# Altium PCB 遥控按键.PCBDOC
Units mm, origin at the board's own origin, x right, y up, seen from the top; angles counter-clockwise.
Board outline 70.36 x 87.5 mm, 2 copper layers (Top Layer, Bottom Layer); 26 components, 33 nets, 105 pads, 48 vias.
Unrouted connection lines stored in the file: 4.
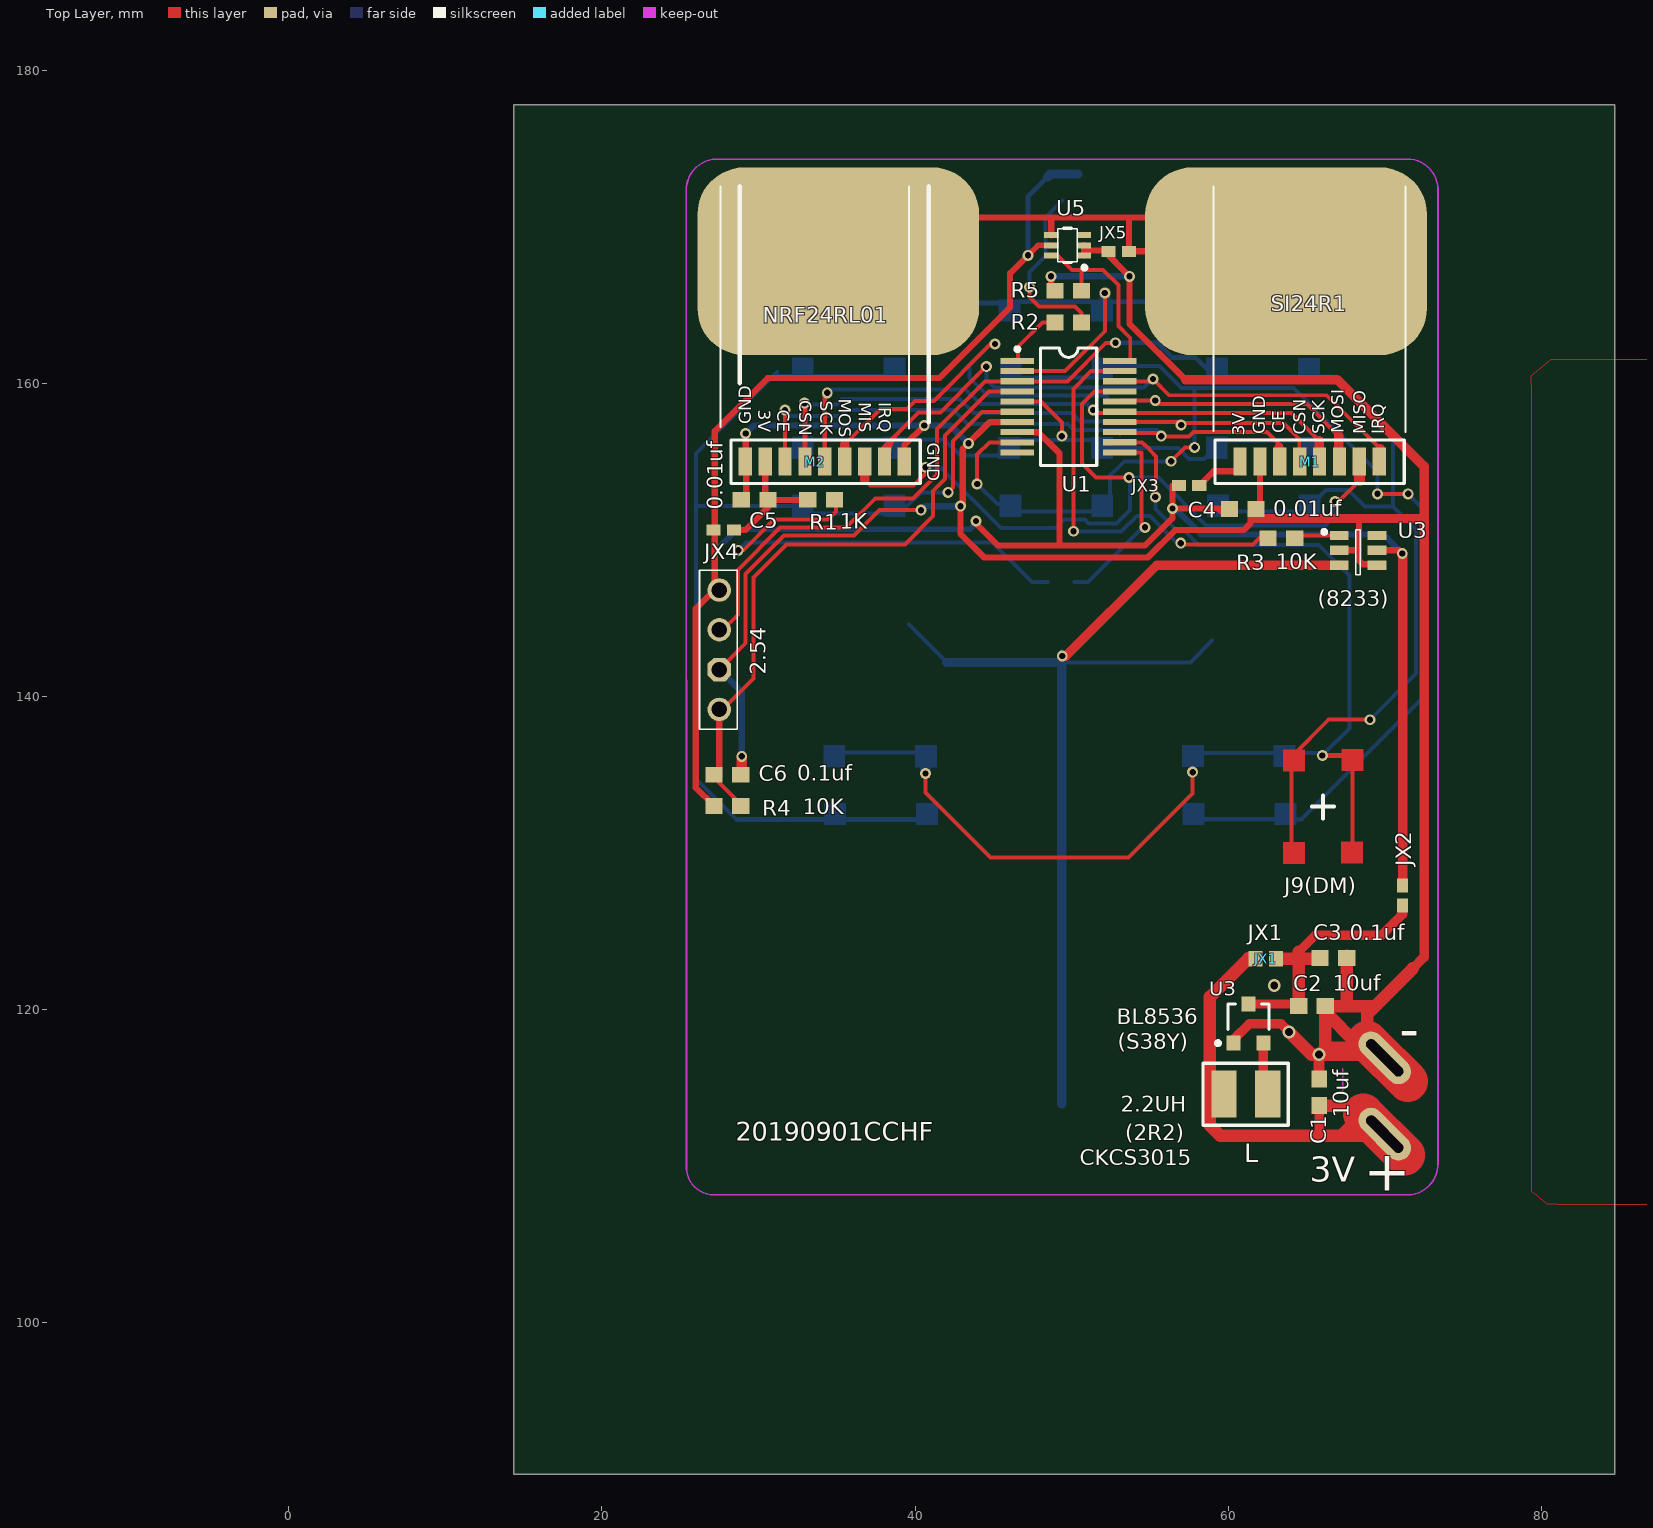
[diagram p0: Top Layer view]
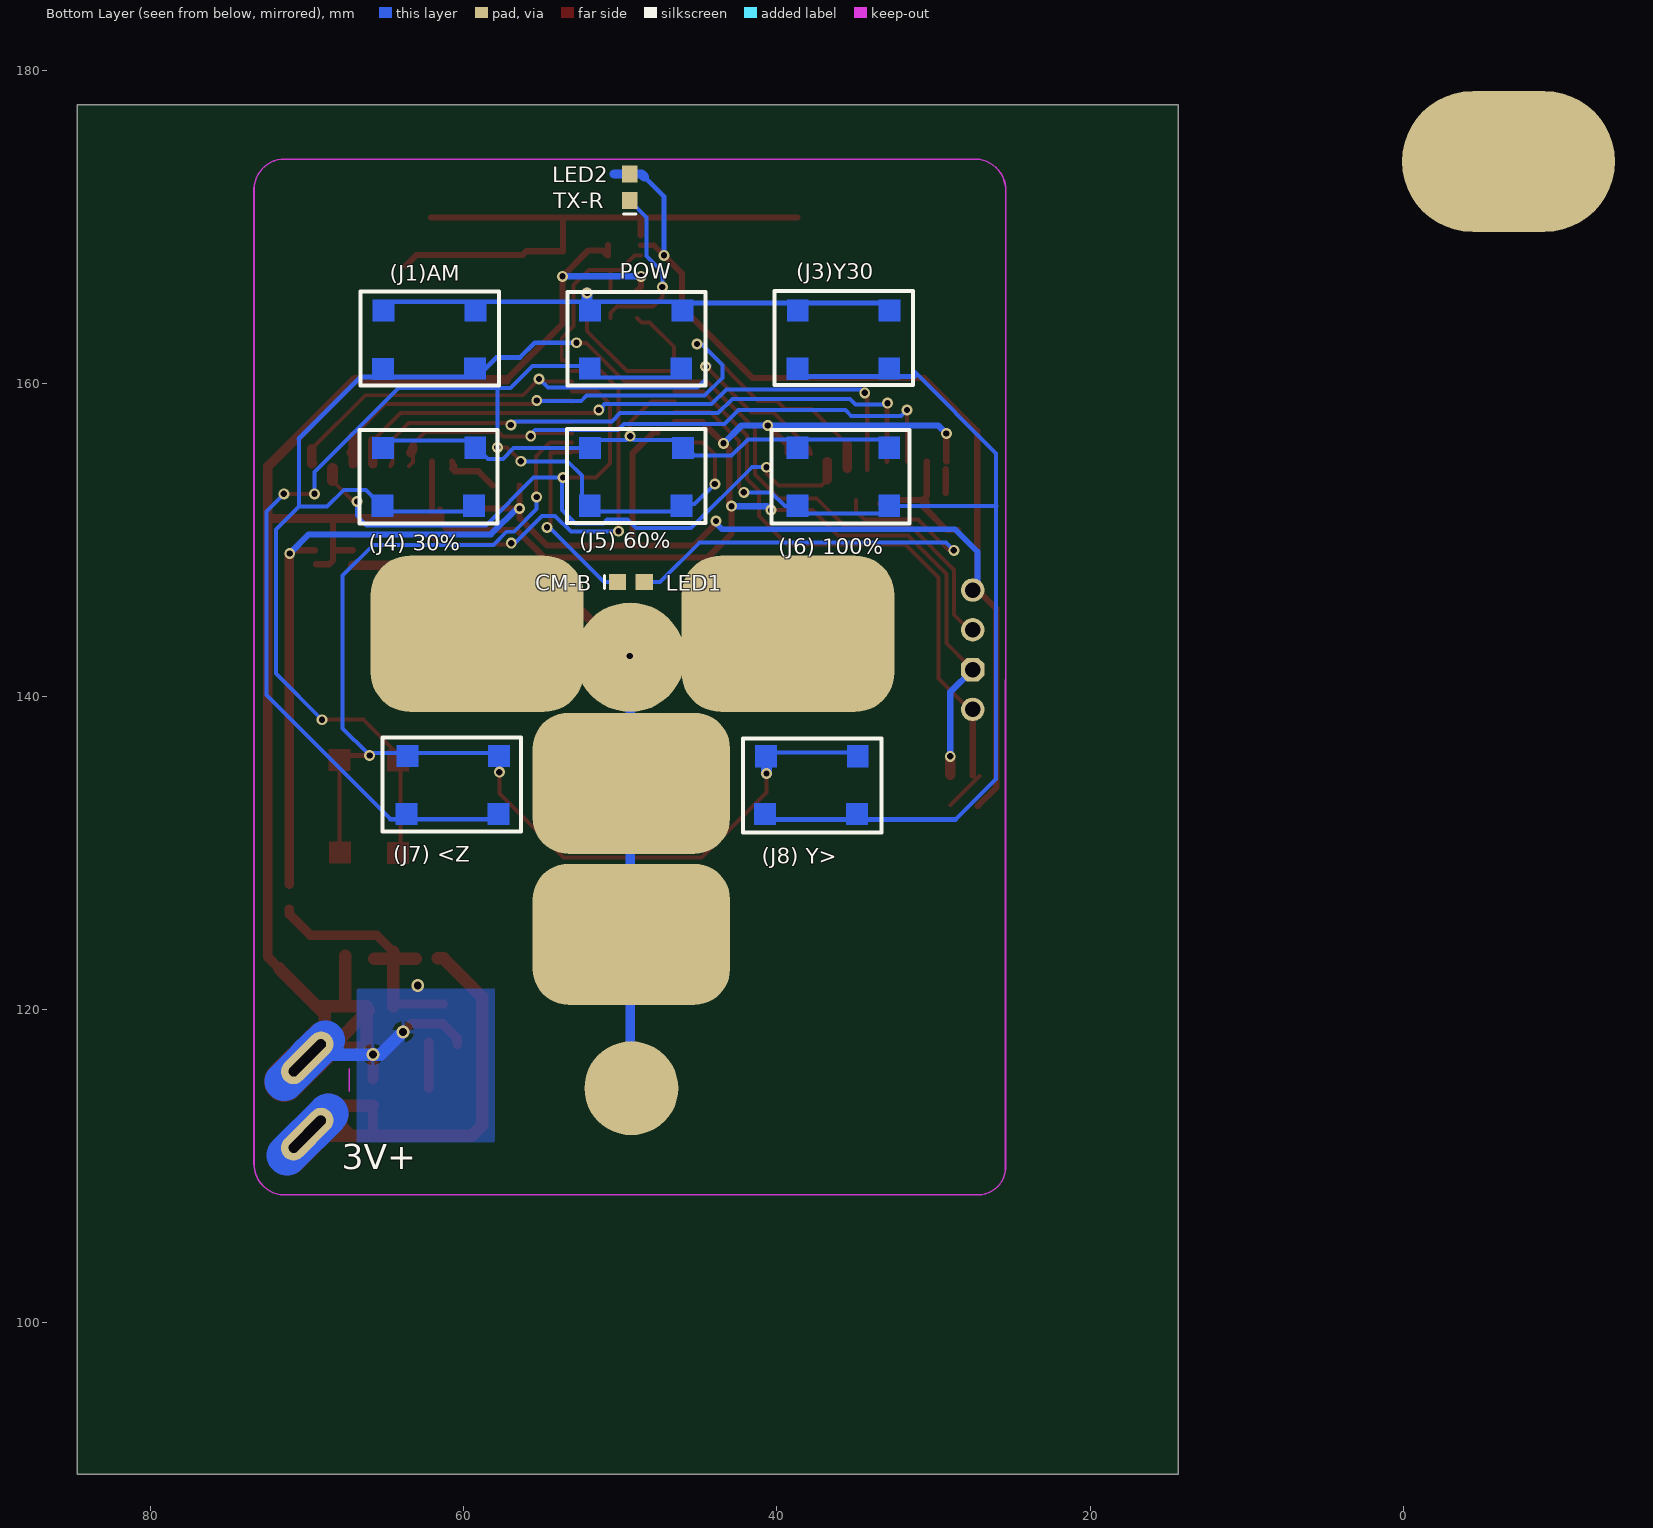
[diagram p1: Bottom Layer view, seen from below]

## Layer stack, top to bottom
Top Layer: signal copper 0.0356
Dielectric: dielectric 0.32, FR-4, Dk 4.8
Bottom Layer: signal copper 0.0356

## Board outline
19.304,90.297 84.709,90.297 84.709,177.8 14.351,177.8 14.351,90.297

## Design rules (kind name [scope] priority, off if disabled: settings)
Clearance [All] p1: gap=0.254
FabricationTestPointUsage TestPointUsage [All] p1: valid=0 allowmultiple=FALSE
FabricationTestpoint Testpoint [All] p1: side=3 testpointundercomponent=TRUE minsize=1.016 maxsize=2.54 preferedsize=1.524 minholesize=0 maxholesize=1.016 preferedholesize=0.813 testpointgrid=0.025 allowsidetop=TRUE allowsidebottom=TRUE usegrid=TRUE gridtolerance=0
PolygonConnect [All] p1: connectstyle=Relief reliefconductorwidth=0.254 reliefentries=4 polygonreliefangle="90 Angle"
RoutingVias [All] p1: holewidth=0.4 width=0.8 viastyle="Through Hole" minholewidth=0.4 minwidth=0.6 maxholewidth=1 maxwidth=1.5
SilkscreenOverComponentPads [All] p1: minsilkscreentomaskgap=0.254
SolderMaskExpansion [All] p1: expansion=0.102
Width Width_9 [InNet('3V3')] p1: maxlimit=1 minlimit=0.254 preferedwidth=0.6 toplayer_prefwidth=0.55 minimp=50.000000 maximp=50.000000 favimp=50.000000
Width Width_8 [InNet('3V+')] p2: maxlimit=3 minlimit=0.254 preferedwidth=0.8 toplayer_prefwidth=0.55 minimp=50.000000 maximp=50.000000 favimp=50.000000
Width Width_7 [InNet('L-3V')] p3: maxlimit=1 minlimit=0.254 preferedwidth=0.6 toplayer_prefwidth=0.55 minimp=50.000000 maximp=50.000000 favimp=50.000000
Width Width_6 [InNet('T-3V')] p4: maxlimit=1 minlimit=0.254 preferedwidth=0.6 toplayer_prefwidth=0.55 minimp=50.000000 maximp=50.000000 favimp=50.000000
Width Width_5 [InNet('3V')] p5: maxlimit=1 minlimit=0.254 preferedwidth=0.6 toplayer_prefwidth=0.39 minimp=50.000000 maximp=50.000000 favimp=50.000000
Width Width_4 [InNet('T-3V')] p6: maxlimit=1 minlimit=0.254 preferedwidth=0.6 toplayer_prefwidth=0.55 minimp=50.000000 maximp=50.000000 favimp=50.000000
Width Width_3 [InNet('D1-')] p7: maxlimit=1 minlimit=0.3 preferedwidth=0.8 toplayer_prefwidth=0.6 minimp=50.000000 maximp=50.000000 favimp=50.000000
Width Width_2 [InNet('GND')] p8: maxlimit=3 minlimit=0.254 preferedwidth=0.8 toplayer_prefwidth=0.39 minimp=50.000000 maximp=50.000000 favimp=50.000000
Width Width_1 [InNet('3V')] p9: maxlimit=1 minlimit=0.254 preferedwidth=0.6 toplayer_prefwidth=0.55 minimp=50.000000 maximp=50.000000 favimp=50.000000
Width [All] p10: maxlimit=2 minlimit=0.254 preferedwidth=2 bottomlayer_prefwidth=0.8 minimp=50.000000 maximp=50.000000 favimp=50.000000
25 further rules are at their usual default settings.

## Components (designator, comment, footprint, x,y, rotation, side; value= is the part's Value field where it differs from the comment)
2.54 "2.54HP" HDR1X4 27.5,139.167 r90 top (schematic designator SX)
(8233) "U3" SOT23-6_M 68.301,149.327 r0 top
C1 "10uf" CR1608-0603 65.811,114.706 r90 top
C2 "10uf" CR1608-0603 65.354,120.218 r180 top
C3 "0.1uf" CR1608-0603 66.726,123.292 r0 top
C4 "0.01uf" CR1608-0603 60.935,151.968 r180 top
C5 "0.01uf" CR1608-0603 29.75,152.552 r0 top
C6 "0.1uf" CR1608-0603 28.016,135 r0 top
JX1 "JX1" CR1005-0402#1 62.408,123.241 r0 top
JX2 "JX3" CR1005-0402#2 71.145,127.279 r270 top
JX3 "JX2" CR1005-0402#2 57.506,153.467 r0 top
JX4 "JX2" CR1005-0402#2 27.788,150.622 r0 top
JX5 "JX2" CR1005-0402#2 53.01,168.427 r180 top
L "2.2UH" L7 61.519,115.57 r180 top locked
LED1 "CM-B" CC1608-0603 49.327,147.3 r180 bottom
LED2 "TX-R" CC1608-0603 49.403,172.517 r90 bottom
M1 "SI24R1" MHDR1X8 69.65,155 r180 top locked
M2 "NRF24L01" MHDR1X8 38.049,155 r180 top locked
R1 "1K" CR1608-0603 34,152.552 r180 top
R2 "1K" CR1608-0603 49.784,163.881 r180 top
R3 "10K" CR1608-0603 63.398,150.089 r180 top
R4 "10K" CR1608-0603 28.016,133 r0 top
R5 "10K" CR1608-0603 49.784,165.913 r180 top
U1 "STM8L051F3P6" SSOP20 49.809,158.501 r270 top locked
U3 "BL8536" SO-G3/C2.5 61.3,119.1 r0 top
U5 "BL1551-A810" SOT23-6_N 49.75,168.808 r180 top

## Footprints (in the part's own frame and the unit in brackets; to place one, negate y for a bottom-side part, rotate by r counter-clockwise, add the part's x,y. Pads: shape width x height; smd on the part's side, far side on the other; paste and mask are expansions set on the pad)
CC1608-0603 [mm] "Chip Capacitor; Body 1.6 x 0.8 mm (LxW typ)"
  rect 1.1x1 smd: 1(-0.85,0) 2(0.85,0)
  silkscreen extent -1.7,-0.4 -1.7,0.4
CR1005-0402#1 [mm] "Chip Resistor; Body 1.1 x 0.5 mm (LxW typ)"
  rect 0.9x1 smd: 1(-0.65,0) 2(0.65,0)
CR1005-0402#2 [mm] "Chip Resistor; Body 1.1 x 0.5 mm (LxW typ)"
  rect 0.9x0.7 smd: 1(-0.65,0) 2(0.65,0)
CR1608-0603 [mm] "Chip Resistor; Body 1.6 x 0.8 mm (LxW typ)"
  rect 1.1x1 smd: 1(-0.85,0) 2(0.85,0)
HDR1X4 [mm]
  round 1.5 hole 1: 1(0,0) 3(5.08,0) 4(7.62,0)
  oct 1.5x1.5 hole 1: 2(2.54,0)
  silkscreen extent -1.27,-1.14 8.89,1.27
L7 [mm]
  rect 1.6x3 smd: 1(1.791,0.964) 2(-1.009,0.964)
  silkscreen extent -2.31,-1.01 3.12,2.96
MHDR1X8 [mm] "Connector; Header; 8 Position"
  rect 0.85x1.8 smd: 1(0,0) 2(1.27,0) 3(2.54,0) 4(3.81,0) 5(5.08,0) 6(6.35,0) 7(7.62,0) 8(8.89,0)
  silkscreen extent -1.6,-1.36 10.49,1.4
SO-G3/C2.5 [mm]
  rect 0.9x0.95 smd: 1(-0.95,-1.25) 2(0.95,-1.25) 3(0,1.25)
  silkscreen extent -2.07,-1.37 1.3,1.25
SOT23-6_M [mm]
  rect 1.2x0.59 smd: 1(-1.2,0.95) 2(-1.2,0) 3(-1.2,-0.95) 4(1.2,-0.95) 5(1.2,0) 6(1.2,0.95)
  silkscreen extent -2.29,-1.55 0.15,1.31
SOT23-6_N [mm] "SOT23, 6-Leads, Body 2.9x1.6mm, Pitch 0.95mm, Lead Span 2.7mm, IPC Medium Density"
  rect 0.9x0.39 smd: 1(-1.05,0.65) 2(-1.05,0) 3(-1.05,-0.65) 4(1.05,-0.65) 5(1.05,0) 6(1.05,0.65)
  silkscreen extent -1.19,-1.09 0.63,1.55
SSOP20 [mm] "SSOP, Plastic; 20 Leads; Body Width 5.3 mm; Pitch 0.65 mm"
  rect 0.39x2.15 smd: 1(-2.925,-3.275) 2(-2.275,-3.275) 3(-1.625,-3.275) 4(-0.975,-3.275) 5(-0.325,-3.275) 6(0.325,-3.275) 7(0.975,-3.275) 8(1.625,-3.275) 9(2.276,-3.275) 11(2.925,3.275) 13(1.625,3.275) 15(0.325,3.275) 16(-0.325,3.275) 17(-0.975,3.275) 18(-1.625,3.275) 19(-2.275,3.275) 20(-2.925,3.275)
  rect 0.395x2.15 smd: 10(2.925,-3.275) 12(2.276,3.275) 14(0.975,3.275)
  silkscreen extent -3.8,-3.4 3.75,1.8

## Part data
U1: library part ST6208CN6, "8-Bit ROM MCU with A/D Converter, Two Timers, Oscillator Safeguard and Safe Reset, 20-Pin SSOP, Industrial"
U3: library part QNPN, "N"

## Free pads (board coordinates)
  oval 13.6x9 smd far side: 0(-6.73,174.166)
  rrect50% 18x12 smd: 0(35.1,167.792) 0(63.703,167.792)
  rrect50% 13.6x10 smd far side: 0(39.3,144) 0(59.15,144)
  rect 0.85x1.8 smd: 0(39.319,155)
  round 6 smd far side: 0(49.3,114.97)
  rrect50% 12.6x9 smd far side: 0(49.3,124.8) 0(49.3,134.442)
  round 7 smd far side: 0(49.378,142.5)
  oval 4.1x1.6 hole 0.65 slot 3.1 at 135 deg rot 135: 1(70,112.038) 1(70,116.91)

## Via types
v1: diameter 0.7, hole 0.4, Top Layer to Bottom Layer, 45 vias
v2: diameter 0.82, hole 0.5, Top Layer to Bottom Layer, 3 vias

## Nets (pads, with @x,y where several pads share a name; then routed paths per layer and width w, separated by ;. In a path a pad name is that pad's centre, name@x,y a point inside that pad or via, vN(x,y) a via of type N, cw(c..) or ccw(c..) an arc to the next point about the centre after c; other vN are vias at no path point)
3.3V: 
3V: 2.54.4 (8233).5 C2.2 C3.1 C4.2 C5.2 JX1.2 JX2.1 JX2.2 JX3.1 JX3.2 JX4.1 JX4.2 LED2.2 M1.8 M2.7 R1.2 R4.1 U1.8 U3.3 U5.5 | length 178.2
  Top Layer w0.36: v1(47.219,168.173) 47.854,168.808 U5.5
  Top Layer w0.39: 2.54.4@27.203,147.269 27.203,156.947 30.582,160.325 41.554,160.325 46.076,164.846 46.076,167.03 v1(47.219,168.173) ; 2.54.4@27.229,147.058 2.54.4 ; C5.2@30.414,152.39 30.577,152.552 30.67,152.552 33.172,152.552 R1.2@33.426,152.298 ; JX3.1@56.439,153.467 v1(56.439,151.994) 59.399,151.994 C4.2@59.729,151.663 ; JX3.2 59.07,154.381 60.58,154.381 60.604,154.406 M1.8@60.658,154.822 ; M1.8@60.605,154.407 M1.8@60.61,154.411 ; M1.8@60.76,154.561 60.658,154.46 M1.8@60.61,154.411 ; M1.8 60.61,154.711 M1.8@60.61,154.411
  Top Layer w0.4: R4.1 25.997,134.169 25.997,145.606 27.178,146.787 2.54.4 ; JX4.2 29.159,150.622 30.67,152.132 30.67,152.552 30.429,152.793 M2.7 ; v1(43.891,151.206) 43.891,151.054 45.314,149.631 54.686,149.631 56.439,151.384 v1(56.439,151.994) ; 47.638,156.874 47.875,156.874 49.225,155.524 49.225,149.682 ; M1.8@60.605,154.407 M1.8 ; M1.8@60.658,154.46 M1.8@60.658,154.822 ; 69.501,149.327 70.917,149.327 v1@71.145,149.098
  Top Layer w0.6: U3.3 C2.2@64.469,120.35 ; 64.504,123.686 65.557,124.739 69.799,124.739 71.145,126.086 JX2.2@71.145,126.416 ; JX2.1@71.145,127.991 v1@71.145,149.098
  Top Layer w0.8: JX1.2 C3.1@65.723,123.241 ; C2.2 64.504,123.686
  Bottom Layer w0.3: v1@47.219,168.097 47.219,171.933 48.463,173.177
  Bottom Layer w0.38: 2.54.4@27.711,146.787 27.203,147.295 27.203,149.25 28.626,150.673 43.51,150.673 43.891,151.054 v1(43.891,151.206)
  Bottom Layer w0.4: v1@56.528,152.083 58.269,150.343 69.901,150.343 v1(71.12,149.123)
  Bottom Layer w0.6: 48.463,173.177 48.653,173.367 50.394,173.367
3V+: C1.1 JX1.1 L.1 pad.1@70,112.038 | length 43.4
  Top Layer w0.254: 66.624,111.941 66.65,111.967
  Top Layer w0.6: 65.811,112.017 C1.1 ; pad.1@68.631,113.335 pad.1@69.571,112.395
  Top Layer w0.8: JX1.1@61.671,123.266 61.29,123.266 58.826,120.802 58.826,112.598 59.483,111.941 66.624,111.941 67.237,111.941 ; C1.1 68.109,113.856 68.378,113.587 pad.1@68.378,113.082 ; pad.1@68.631,113.335 pad.1@68.378,113.082 ; pad.1@69.571,112.395 pad.1@69.213,112.038 ; 67.237,111.941 69.903,111.941 pad.1@70,112.038 ; 67.237,111.941 pad.1@68.378,113.082 ; pad.1@68.378,113.082 68.378,112.038 pad.1@69.213,112.038 ; pad.1@69.213,112.038 69.178,112.002 pad.1@70,112.038 ; pad.1@69.213,112.038 69.928,112.038 pad.1@70,112.038
  Top Layer w2.6: pad.1@68.631,113.335 pad.1@71.26,110.706
  Bottom Layer w2.6: pad.1@68.658,113.333 pad.1@71.298,110.693
AHLB: 
BAT_ADC: U1.10
CE: M1.6 M2.6 U1.13 | length 41.2
  Top Layer w0.254: M2.6 v1(31.699,158.293) ; U1.13@53.081,156.804 53.096,156.82 55.524,156.82 55.753,156.591 57.513,156.591 57.798,156.876 62.478,156.876 63.246,156.108 63.246,154.965 M1.6@63.5,154.711
  Top Layer w0.6: 63.246,155.907 ccw(c63.732,155.907) 63.388,155.563 cw(c63.732,155.907) 63.246,155.907
  Bottom Layer w0.254: v1(31.699,158.293) 32.08,157.912 35.255,157.912 35.636,158.293 42.469,158.293 43.358,157.404 49.784,157.404 50.165,157.023 55.448,157.023 v1@55.728,156.743
  other v1: 55.728,156.616
CMOUT: (8233).1 R3.1 R3.2 U1.19 | length 29.7
  Top Layer w0.254: v1(50.114,150.546) 50.114,159.639 51.251,160.776 U1.19 ; v1@56.972,149.911 57.175,149.708 61.595,149.708 62.164,150.277 R3.2@62.687,150.277 ; R3.1@64.248,150.277 67.101,150.277
  Bottom Layer w0.254: v1(50.114,150.546) 50.114,150.724 50.317,150.52 53.162,150.52 54.173,151.531 54.997,151.531 56.753,149.774 v1@56.963,149.774
  other v1: 56.972,149.784
CSN: M1.5 M2.5 U1.14 | length 42.9
  Top Layer w0.254: U1.14 56.799,157.526 v1(56.998,157.328) ; v1@56.998,157.452 63.528,157.452 64.541,156.439 64.541,154.864 64.694,154.711 M1.5
  Top Layer w0.3: v1(32.944,158.725) 32.969,158.699 M2.5
  Bottom Layer w0.254: v1(32.944,158.725) 32.868,158.648 34.976,158.648 35.331,159.004 42.85,159.004 43.764,158.09 50.013,158.09 50.546,157.556 56.769,157.556 v1(56.998,157.328)
GND: 2.54.2 (8233).2 (8233).4 C1.2 C2.1 C3.2 C4.1 C5.1 C6.2 JX5.2 M1.7 M2.8 pad.0@39.319,155 pad.1@70,116.91 R5.2 U1.7 U3.1 U5.1 U5.2 | length 222.8
  Top Layer w0.254: 2.54.2@27.711,141.918 29.185,143.391 29.185,147.828 31.623,150.266 36.093,150.266 37.719,151.892 40.183,151.892 v1@40.386,151.689
  Top Layer w0.4: 2.54.2@27.711,141.707 2.54.2@27.711,141.918 ; M2.8 29.185,155.025 v1(29.185,156.794) ; C5.1@29.21,152.994 M2.8@29.21,154.508 ; pad.0@39.319,155.549 39.319,156.032 v1@40.615,157.328 ; U1.7 44.775,157.526 43.053,155.804 43.053,152.298 v1(42.901,152.146) 42.901,150.393 44.425,148.869 54.864,148.869 56.617,150.622 60.985,150.622 61.429,151.066 C4.1@61.429,151.663 ; v1(48.692,166.827) 48.692,166.155 R5.2 ; U5.2 U5.1 51.119,168.478 52.045,168.478 v1(53.696,166.827) 53.696,163.805 57.277,160.223 ; C4.1@61.519,151.917 C4.1@61.849,151.587 ; 61.62,151.359 62.03,151.768 M1.7 ; 67.101,149.327 68.263,149.327 ; 68.351,151.409 68.351,148.692 68.605,148.438 69.437,148.438 ; pad.1@69.127,117.766 69.545,117.348 pad.1@70,116.91
  Top Layer w0.6: 57.277,160.223 66.98,160.223 72.517,154.686 72.517,123.342 71.806,122.631 ; U3.1@60.411,117.789 60.411,118.145 61.341,119.075 63.398,119.075 v2@63.856,118.618 ; 61.62,151.359 72.517,151.359
  Top Layer w0.7: C6.2@28.931,135 v1(28.931,136.169) ; C1.2 v2(65.811,117.119)
  Top Layer w0.8: v2(63.881,118.567) 65.329,117.119 v2(65.811,117.119) ; C2.1@66.091,119.939 C2.1@66.204,119.825 ; 66.524,117.562 68.897,117.562 68.455,117.119 v2(65.811,117.119) ; 67.576,120.269 C3.2@67.576,123.444 ; pad.1@68.897,117.97 68.897,119.723 71.806,122.631 ; pad.1@69.127,117.766 69.102,117.766 68.263,117.766 C2.1@66.204,119.825 ; 69.336,120.218 C2.1 C2.1@66.204,119.825 ; v2(65.811,117.119) 66.204,117.512 C2.1@66.204,119.825
  Top Layer w2.6: pad.1@68.897,117.97 69.102,117.766 71.476,115.392
  Bottom Layer w0.4: 2.54.2 28.931,140.276 v1(28.931,136.169) ; v1(29.185,156.794) 29.693,157.302 v1(40.589,157.302) 42.266,157.302 v1(43.409,156.159) ; v1(40.386,151.892) 40.64,152.146 v1(42.901,152.146) v1@42.901,152.095 ; v1(48.692,166.827) 53.721,166.827 v1@53.708,166.84 ; 68.683,116.994 68.683,117.119 68.683,118.21 pad.1@70,116.91
  Bottom Layer w0.8: v2(63.881,118.567) 65.329,117.119 v2(65.811,117.119) 68.683,117.119 69.748,117.119 69.791,117.119 pad.1@70,116.91
  Bottom Layer w2.5: pad.1@70,116.91 68.836,118.032 69.748,117.119 71.476,115.392
  other v2: 62.941,121.539
GND2: JX5.1 pad.0@35.1,167.792 pad.0@63.703,167.792 U5.4 | length 37.1
  Top Layer w0.4: pad.0@38.684,170.586 53.619,170.586 ; U5.4 48.699,170.552 ; pad.0@62.078,170.586 53.619,170.586 ; pad.0@63.703,167.5 63.004,168.199 56.236,168.199 56.007,168.427 JX5.1 53.66,170.546 53.619,170.586
HWKZ: 
HWPOW: 
IRQ: M1.1 M2.1 U1.18 | length 47.4
  Top Layer w0.254: M2.1@37.92,155.744 ccw(c37.627,156.355) 38.282,156.18 ; 38.049,155.956 40.234,158.14 41.631,158.14 44.323,160.833 v1@44.323,161.138 ; 38.25,156.06 ccw(c38.805,155.911) M2.1@38.307,155.624 ; U1.18 55.046,160.126 v1(55.194,160.274) 56.236,159.233 66.294,159.233 M1.1@69.723,155.804 ; M1.1@69.469,154.864 M1.1@69.621,154.711 ; M2.1@37.839,155.475 cw(c38.493,155.475) 38.031,155.938 ccw(c38.493,155.475) M2.1@37.839,155.475 ; M2.1@38.093,155.475 cw(c39.361,155.475) 38.464,156.371 ccw(c39.361,155.475) M2.1@38.093,155.475 ; M2.1@38.347,155.475 cw(c40.228,155.475) 38.898,156.805 ccw(c40.228,155.475) M2.1@38.347,155.475
  Top Layer w0.6: M1.1@69.723,154.838 M1.1@69.723,155.804
  Bottom Layer w0.254: v1@44.323,161.138 44.552,160.909 44.552,160.249 45.085,159.715 54.635,159.715 v1(55.194,160.274)
  other v1: 44.552,161.061
JA: U1.2 | length 45.8
  Top Layer w0.254: U1.2 49.575,160.776 52.121,163.322 v1(52.121,165.76)
  Bottom Layer w0.254: 51.892,165.202 51.892,164.567 ; 51.968,165.202 51.968,164.516 51.918,164.567 51.892,164.567 ; 51.892,164.567 51.816,164.49 51.74,164.567 51.892,164.567
  Bottom Layer w0.3: 33.146,165.125 45.466,165.125 45.999,164.592 ; 45.955,164.871 46.285,165.202 51.892,165.202 51.968,165.202 64.541,165.202 65.202,164.541
  Bottom Layer w0.4: 32.536,164.516 33.146,165.125
  Bottom Layer w0.7: 52.121,164.389 v1(52.121,165.76)
JB: U1.5 | length 38.7
  Top Layer w0.254: U1.5 48.057,158.826 49.378,157.505 v1(49.378,156.616)
  Bottom Layer w0.254: 32.588,156.261 32.741,156.413 41.859,156.413 42.901,155.372 45.263,155.372 46.279,156.388 49.149,156.388 v1(49.378,156.616) 49.606,156.388 51.74,156.388 52.273,155.854 56.82,155.854 57.5,155.174 58.451,155.174 59.614,156.337 64.795,156.337 ; 58.673,155.296 58.723,155.346 ; 65.405,155.956 65.43,155.931
JC: U1.12 | length 80.3
  Top Layer w0.254: v1(40.665,135.077) 40.665,133.858 44.831,129.692 53.645,129.692 57.734,133.782 v1(57.734,135.153) ; U1.12 54.493,156.225 54.635,156.083 54.668,156.083 54.966,155.785 54.966,155.753 55.397,155.321 v1@55.397,152.654 ; 67.945,130.302 67.945,136.144
  Top Layer w0.3: v1(66.015,136.22) 67.462,136.22
  Bottom Layer w0.254: 34.519,136.195 34.747,136.423 40.665,136.423 40.894,136.195 40.894,135.89 40.716,136.068 ; 40.589,136.169 40.665,136.093 ; v1(55.347,152.73) 55.347,151.968 56.8,150.515 57.275,150.515 58.108,149.682 65.786,149.682 67.742,147.726 67.742,137.947 66.167,136.373 58.09,136.373
  Bottom Layer w0.4: v1(57.734,135.153) 57.734,136.449
  Bottom Layer w0.7: v1(40.665,135.077) 40.665,136.093
JD: U1.6 | length 77.4
  Top Layer w0.254: v1(42.113,153.035) 42.418,153.34 42.418,156.312 44.282,158.176 U1.6
  Bottom Layer w0.254: 25.984,152.146 32.995,152.146 ; 28.6,132.131 25.997,134.734 25.997,155.512 31.191,160.706 ; 32.662,152.273 33.246,151.689 38.71,151.689 39.167,152.146 39.497,152.146 40.386,153.035 v1(42.113,153.035) ; 38.379,160.706 38.659,160.985
  Bottom Layer w0.3: 28.6,132.131 40.538,132.131 40.919,132.512 ; 31.217,160.426 38.405,160.426
JE: U1.9 | length 86.8
  Top Layer w0.254: v1@43.967,153.416 43.967,155.448 44.745,156.225 U1.9 ; v1(56.363,155.016) 57.252,155.905 v1(57.861,155.905) ; v1@69.52,152.933 v1(71.501,152.933)
  Bottom Layer w0.254: v1(43.967,153.568) 45.263,152.273 46.203,152.273 46.66,151.816 51.841,151.816 52.019,151.994 ; 46.05,160.376 51.689,160.376 ; 51.943,160.96 52.095,161.112 55.601,161.112 57.023,159.69 64.186,159.69 69.545,154.33 v1(69.545,152.933) ; 52.273,151.765 52.451,151.943 52.451,154.102 53.365,155.016 v1(56.363,155.016) ; v1(57.861,155.905) 57.861,159.69 ; 64.694,132.156 72.619,140.081 72.619,151.816 v1(71.501,152.933)
  Bottom Layer w0.3: 58.039,132.156 64.694,132.156
JF: 
L1: L.2 U3.2 | length 2.9
  Top Layer w0.6: L.2@62.24,114.971 U3.2@62.24,117.901
LED2: LED2.1 R2.1 | length 11.1
  Top Layer w0.254: v1(47.32,166.141) 47.32,165.506 47.93,164.897 50.216,164.897 50.634,164.479 R2.1@50.634,164.16
  Bottom Layer w0.254: v1(47.32,166.141) 47.32,167.107 48.336,168.123 48.336,170.6 LED2.1
MISO: M1.2 M2.2 U1.17 | length 51.7
  Top Layer w0.254: 36.779,153.848 37.16,153.467 39.903,153.467 40.665,154.229 v1(40.665,154.635) ; U1.17 51.45,159.476 50.653,158.679 50.653,154.884 51.562,153.975 v1@53.391,153.975 ; v1(66.827,152.451) 67.056,152.451 68.377,153.772 ; M1.2@68.38,154.561 M1.2@68.53,154.711
  Top Layer w0.6: 36.779,153.848 M2.2
  Top Layer w0.7: 68.377,153.772 68.38,153.775 M1.2@68.38,154.561
  Bottom Layer w0.254: v1@40.691,154.635 41.605,154.635 45.491,150.749 48.997,150.749 49.53,151.282 50.851,151.282 51.079,151.054 52.857,151.054 53.721,151.917 v1@53.721,153.975 ; v1(53.67,153.975) 55.55,153.975 58.598,150.927 66.218,150.927 66.827,151.536 v1@66.827,152.553
MOSI: M1.3 M2.3 U1.16 | length 47.1
  Top Layer w0.254: 35.509,156.083 37.795,158.369 39.497,158.369 40.005,158.877 41.199,158.877 44.831,162.509 v1(45.11,162.509) ; U1.16 53.158,158.9 v1(55.344,158.9) 55.57,158.674 65.024,158.674 67.056,156.642 ; M1.3@67.056,154.864 M1.3@67.208,154.711
  Top Layer w0.6: M2.3@35.509,154.559 35.509,156.083 ; M1.3@67.056,154.864 67.056,156.642 ; 67.056,155.907 ccw(c67.542,155.907) 67.198,155.563 cw(c67.542,155.907) 67.056,155.907
  Bottom Layer w0.254: v1@45.06,162.458 v1(45.11,162.509) 44.831,162.509 43.485,161.163 43.485,160.35 44.628,159.207 52.172,159.207 52.502,158.877 v1@55.397,158.877
POW+: R5.1 U1.20 U5.6 | length 11.7
  Top Layer w0.254: U5.6 49.088,168.158 50.013,167.234 50.622,167.234 ; R5.1 50.634,167.222 50.622,167.234 ; U1.20@53.543,161.442 53.746,161.442 53.746,162.89 52.984,163.652 52.984,166.268 52.019,167.234 50.622,167.234
R3: 
RST: 2.54.1 C6.1 R4.2 U1.4 | length 40.4
  Top Layer w0.254: C6.1@27.076,134.899 R4.2@28.926,133.049 ; 2.54.1@27.711,139.167 29.693,141.148 29.693,147.599 31.801,149.708 39.345,149.708 41.148,151.511 41.148,153.111 41.91,153.873 41.91,156.667 44.719,159.476 U1.4
  Top Layer w0.4: C6.1@27.5,134.95 2.54.1
SCK: M1.4 M2.4 U1.15 | length 39.6
  Top Layer w0.254: v1(51.384,158.293) 51.573,158.104 54.317,158.104 54.332,158.09 64.059,158.09 65.811,156.337 ; M1.4@65.659,154.711 M1.4@65.811,154.864
  Top Layer w0.3: M2.4@34.239,154.483 34.239,159.233 v1@34.493,159.487
  Top Layer w0.6: M1.4@65.811,154.864 65.811,156.337
  Bottom Layer w0.254: v1(34.392,159.385) 34.62,159.614 43.231,159.614 44.171,158.674 51.003,158.674 51.156,158.521 v1@51.156,158.293
SWIM/JF: 2.54.3 U1.3 | length 99.7
  Top Layer w0.254: 2.54.3@27.711,144.247 28.677,145.212 28.677,148.082 31.369,150.774 35.585,150.774 37.459,152.648 39.872,152.648 41.402,154.178 41.402,157.074 44.454,160.126 U1.3 49.738,160.126 52.197,162.585 v1(52.807,162.585) ; 64.034,131.19 64.034,136.119 66.421,138.506 v1(69.063,138.506) ; 64.059,130.301 64.059,131.166
  Bottom Layer w0.254: 59.436,152.146 59.76,151.822 64.827,151.822 ; 65.507,151.968 65.507,152.425 66.263,153.182 67.671,153.182 68.732,152.121 70.536,152.121 ; v1(69.063,138.506) 72.009,141.453 72.009,150.647 70.536,152.121 ; 70.536,156.464 70.536,152.121
  Bottom Layer w0.3: v1(52.807,162.585) 55.474,162.585 56.413,161.646 57.912,161.646 59.157,160.401 66.599,160.401 70.536,156.464
T-LED: R2.2 U1.1 | length 4
  Top Layer w0.254: U1.1 46.584,161.475 46.584,162.331 48.133,163.881 48.655,163.881 R2.2@48.934,164.16
TCH: (8233).3 pad.0@39.3,144 pad.0@49.3,114.97 pad.0@49.3,124.8 pad.0@49.3,134.442 pad.0@49.378,142.5 pad.0@59.15,144 | length 70
  Top Layer w0.6: v1(49.403,142.57) 49.631,142.57 55.437,148.377 67.101,148.377
  Bottom Layer w0.254: pad.0@39.6,144.6 pad.0@42.036,142.164 ; pad.0@49.371,142.9 49.371,142.164 57.582,142.164 pad.0@58.979,143.561
  Bottom Layer w0.6: pad.0@42.036,142.164 49.371,142.164 pad.0@49.371,113.97
TOG: (8233).6
XY3V: LED1.2 R1.1 | length 29.1
  Top Layer w0.254: v1@28.651,149.352 29.058,149.352 30.988,151.282 34.417,151.282 34.95,151.816 34.937,151.829 R1.1@34.937,152.552
  Bottom Layer w0.254: v1(28.702,149.327) 29.21,149.835 44.933,149.835 47.467,147.3 LED1.2
Z-LED: LED1.1 U1.11 | length 12.4
  Top Layer w0.254: U1.11@52.73,155.626 53.137,155.626 53.188,155.575 54.458,155.575 v1@54.458,150.851
  Bottom Layer w0.254: LED1.1 51.034,147.3 54.534,150.8 v1(54.686,150.8)
pads on no net: U5.3

## Polygon pours and split planes (outlines as drawn)
GND on Top Layer "Top Layer-No Net" (hatched 90Degree grid 1.5 track 0.203, remove dead copper, pour order 5): 79.399,159.86 79.354,159.897 79.354,160.42 79.354,160.482 80.294,161.249 80.624,161.519 81.302,161.519 125.439,161.519 125.49,161.56 126.42,161.56 126.42,161.415 127.233,160.752 127.408,160.609 127.408,159.963 127.408,115.178 127.055,114.89 125.48,113.605 125.48,113.418 121.264,113.418 120.984,113.646 120.248,113.045 120.248,107.51 81.063,107.51 81.013,107.551 80.573,107.551 80.395,107.551 79.735,108.09 79.407,108.357 79.407,108.897 79.407,159.812 79.399,159.819
GND on Bottom Layer "Top Layer-No Net" (solid, remove dead copper, pour order 6): 58.014,111.56 58.04,111.531 66.827,111.531 66.827,121.253 66.801,121.281 66.775,121.31 58.04,121.31

## Keep-outs
Keep-Out Layer:
  lines w0.1: 25.392,172.288 cw(c27.361,172.352) 27.297,174.32 71.435,174.32 cw(c71.435,172.35) 73.403,172.414 73.403,110.084 ; 25.395,172.288 25.403,109.854 ccw(c27.158,109.91) 27.144,108.154 ; 27.058,108.154 71.501,108.154 ; 67.31,114.783 67.311,116.223 ; 71.498,108.154 ccw(c71.435,110.122) 73.403,110.186

## Other copper
Top Layer:
  region net SWIM/JF: 64.921,129.286 64.921,130.683 63.502,130.683 63.502,129.286
  region net JC: 68.627,129.337 68.627,130.734 67.208,130.734 67.208,129.337
  region net JC: 68.653,135.23 68.653,136.627 67.234,136.627 67.234,135.23
  region net SWIM/JF: 64.922,135.204 64.922,136.601 63.503,136.601 63.503,135.204
Bottom Layer:
  rectangle net JB: 32.131,155.17 33.528,156.589
  rectangle net JB: 37.998,155.172 39.395,156.591
  rectangle net JC: 57.048,135.485 58.445,136.904
  rectangle net JC: 62.89,135.485 64.287,136.904
  rectangle net JE: 62.967,131.775 64.364,133.194
  rectangle net JE: 57.099,131.777 58.496,133.196
  rectangle net JC: 34.138,135.462 35.535,136.881
  rectangle net JC: 40.005,135.46 41.402,136.879
  rectangle net JD: 40.056,131.775 41.453,133.194
  rectangle net JD: 34.188,131.777 35.585,133.196
  rectangle net JA: 58.547,163.933 59.944,165.352
  rectangle net JA: 64.44,163.932 65.837,165.351
  rectangle net SWIM/JF: 64.465,160.201 65.862,161.62
  rectangle net SWIM/JF: 58.598,160.227 59.995,161.646
  rectangle net JB: 58.572,155.17 59.969,156.589
  rectangle net JB: 64.465,155.147 65.862,156.566
  rectangle net SWIM/JF: 64.491,151.46 65.888,152.879
  rectangle net SWIM/JF: 58.649,151.46 60.046,152.879
  rectangle net JB: 51.232,155.147 52.629,156.566
  rectangle net JE: 51.257,151.46 52.654,152.879
  rectangle net JA: 45.339,163.935 46.736,165.354
  rectangle net JA: 51.232,163.935 52.629,165.354
  rectangle net JD: 32.131,160.225 33.528,161.644
  rectangle net JA: 37.973,163.932 39.37,165.351
  rectangle net JA: 32.106,163.933 33.503,165.352
  rectangle net JD: 37.998,160.223 39.395,161.642
  rectangle net JD: 37.998,151.464 39.395,152.883
  rectangle net JE: 45.39,151.464 46.787,152.883
  rectangle net JB: 45.314,155.147 46.711,156.566
  rectangle net JE: 45.415,160.227 46.812,161.646
  rectangle net JD: 32.131,151.464 33.528,152.883
  rectangle net JE: 51.257,160.227 52.654,161.646

## Silkscreen, mask and mechanical layers (free items; w line width, h text height)
Top Overlay:
  lines w0.127: 27.559,157.201 27.559,172.568 ; 39.599,157.124 39.599,172.568 ; 59.055,156.947 59.055,172.568 ; 71.323,156.87 71.323,172.568
  lines w0.254: 65.354,132.969 66.777,132.969 ; 66.065,132.207 66.065,133.68
  lines w0.3: 28.804,160.02 28.804,172.568 ; 40.869,157.505 40.869,172.568
  text "SI24R1" at 62.713,164.592 h1
  text "NRF24RL01" at 30.277,163.855 h1
  text "MOS" at 35.128,159.004 h0.8 r270
  text "CSN" at 32.614,158.928 h0.8 r270
  text "SCK" at 33.934,158.877 h0.8 r270
  text "IRQ" at 37.668,158.801 h0.8 r270
  text "MIS" at 36.398,158.775 h0.8 r270
  text "3V" at 29.997,158.318 h0.8 r270
  text "CE" at 31.191,158.293 h0.8 r270
  text "GND" at 29.54,157.378 h0.8 r90
  text "CE" at 63.602,156.82 h0.8 r90
  text "MOSI" at 67.386,156.794 h0.8 r90
  text "GND" at 62.357,156.743 h0.8 r90
  text "SCK" at 66.167,156.743 h0.8 r90
  text "MISO" at 68.783,156.743 h0.8 r90
  text "IRQ" at 69.977,156.743 h0.8 r90
  text "CSN" at 64.948,156.718 h0.8 r90
  text "3V" at 61.062,156.642 h0.8 r90
  text "GND" at 40.767,156.185 h0.8 r270
  text "J9(DM)" at 63.576,127.432 h1
  text "-" at 70.917,117.5 h2.6
  text "(S38Y)" at 52.959,117.45 h1
  text "(2R2)" at 53.442,111.658 h1
  text "20190901CCHF" at 28.55,111.608 h1.2
  text "CKCS3015" at 50.521,110.058 h1
  text "3V" at 65.202,108.991 h1.6
  text "+" at 68.656,108.407 h2.6
Bottom Overlay:
  lines w0.254: 31.318,159.893 40.157,159.893 40.157,165.887 31.318,165.887 31.318,159.893 ; 31.521,151.028 40.361,151.028 40.361,157.023 31.521,157.023 31.521,151.028 ; 33.325,131.318 33.325,137.312 42.164,137.312 42.164,131.318 33.325,131.318 ; 44.552,159.842 53.391,159.842 53.391,165.837 44.552,165.837 44.552,159.842 ; 44.577,151.079 53.416,151.079 53.416,157.074 44.577,157.074 44.577,151.079 ; 56.363,131.369 65.202,131.369 65.202,137.363 56.363,137.363 56.363,131.369 ; 57.76,159.868 66.599,159.868 66.599,165.862 57.76,165.862 57.76,159.868 ; 57.836,151.028 66.675,151.028 66.675,157.023 57.836,157.023 57.836,151.028
  text "POW" at 50.038,166.675 h1
  text "(J3)Y30" at 38.76,166.649 h1
  text "(J1)AM" at 64.745,166.548 h1
  text "(J5) 60%" at 52.629,149.454 h1
  text "(J4) 30%" at 66.065,149.301 h1
  text "(J6) 100%" at 39.929,149.073 h1
  text "(J7) <Z" at 64.516,129.438 h1
  text "(J8) Y>" at 40.97,129.311 h1
  text "3V+" at 67.793,109.779 h1.6
Top Solder:
  region: 68.627,129.337 68.627,130.734 67.208,130.734 67.208,129.337
  region: 68.656,135.23 68.656,136.627 67.237,136.627 67.237,135.23
  region: 64.922,135.204 64.922,136.601 63.503,136.601 63.503,135.204
  region: 64.921,129.311 64.921,130.708 63.502,130.708 63.502,129.311
Bottom Solder:
  rectangle: 32.131,155.17 33.528,156.589
  rectangle: 37.998,155.172 39.395,156.591
  rectangle: 57.048,135.485 58.445,136.904
  rectangle: 62.89,135.485 64.287,136.904
  rectangle: 62.967,131.775 64.364,133.194
  rectangle: 57.099,131.777 58.496,133.196
  rectangle: 34.138,135.462 35.535,136.881
  rectangle: 40.005,135.46 41.402,136.879
  rectangle: 40.056,131.775 41.453,133.194
  rectangle: 34.188,131.777 35.585,133.196
  rectangle: 32.106,163.933 33.503,165.352
  rectangle: 58.547,163.933 59.944,165.352
  rectangle: 64.44,163.932 65.837,165.351
  rectangle: 64.465,160.201 65.862,161.62
  rectangle: 58.598,160.227 59.995,161.646
  rectangle: 58.572,155.17 59.969,156.589
  rectangle: 64.465,155.147 65.862,156.566
  rectangle: 64.491,151.46 65.888,152.879
  rectangle: 58.649,151.46 60.046,152.879
  rectangle: 51.232,155.147 52.629,156.566
  rectangle: 51.257,151.46 52.654,152.879
  rectangle: 45.339,163.935 46.736,165.354
  rectangle: 51.232,163.935 52.629,165.354
  rectangle: 32.131,160.225 33.528,161.644
  rectangle: 37.973,163.932 39.37,165.351
  rectangle: 37.998,160.223 39.395,161.642
  rectangle: 37.998,151.464 39.395,152.883
  rectangle: 45.39,151.464 46.787,152.883
  rectangle: 45.314,155.147 46.711,156.566
  rectangle: 45.415,160.227 46.812,161.646
  rectangle: 32.131,151.464 33.528,152.883
  rectangle: 51.257,160.227 52.654,161.646